# Altium PCB PCB SensorTemperatura.PcbDoc
Units mm, origin at the board's own origin, x right, y up, seen from the top; angles counter-clockwise.
Board outline 13 x 13 mm, 2 copper layers (Top Layer, Bottom Layer), stack 1.571 mm thick; 7 components, 5 nets, 18 pads, 0 vias.
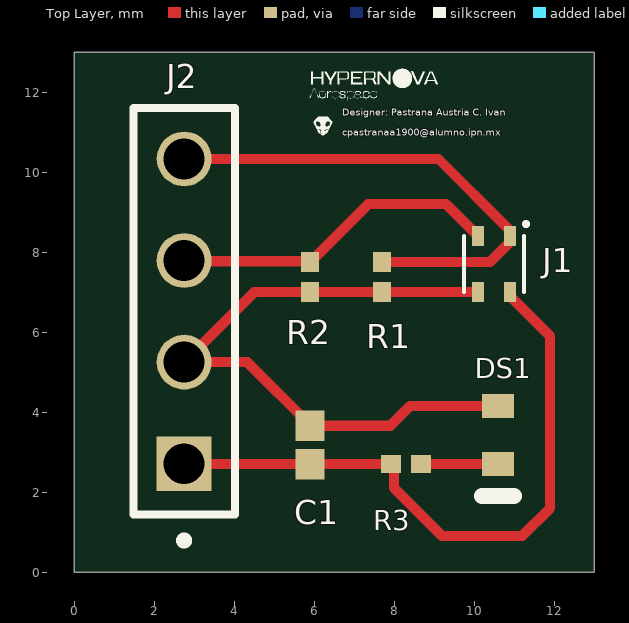
[diagram p0: Top Layer view]
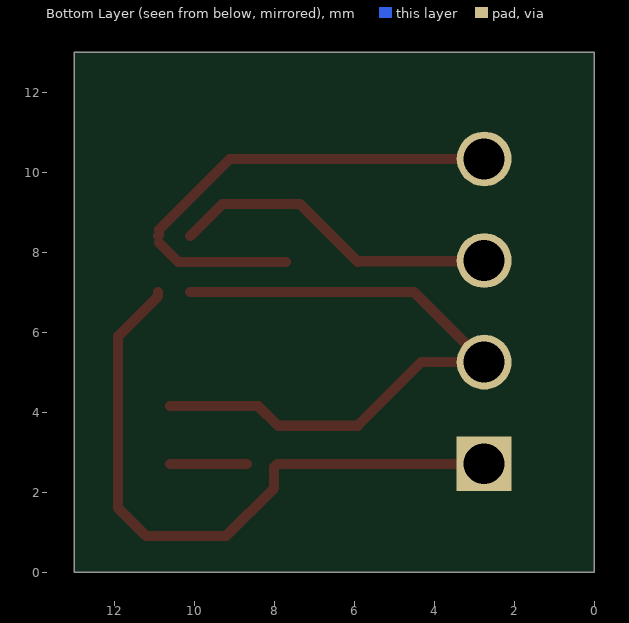
[diagram p1: Bottom Layer view, seen from below]

## Layer stack, top to bottom
Top Solder: solder mask 0.0102, Solder Resist, Dk 3.5
Top Layer: signal copper 0.0356
Dielectric 1: dielectric 1.5, FR-4, Dk 4.8
Bottom Layer: signal copper 0.0356
Bottom Solder: solder mask 0.0102, Solder Resist, Dk 3.5

## Board outline
0,13 13,13 13,0 0,0

## Design rules (kind name [scope] priority, off if disabled: settings)
Clearance [All] p1: gap=0.254 ignorepadtopadclearanceinfootprint=FALSE
PolygonConnect [All] p1: connectstyle=Relief reliefconductorwidth=0.254 reliefentries=4 polygonreliefangle="90 Angle" airgapwidth=0.254
RoutingVias [All] p1: holewidth=0.711 width=1.27 viastyle="Through Hole" minholewidth=0.711 minwidth=1.27 maxholewidth=0.711 maxwidth=1.27
SolderMaskExpansion [All] p1: expansion=0.102 istentingtop=FALSE
Width [All] p1: maxlimit=0.254 minlimit=0.254 preferedwidth=0.254
30 further rules are at their usual default settings.

## Components (designator, comment, footprint, x,y, rotation, side; value= is the part's Value field where it differs from the comment)
C1 "C0402C104K4RACTU" Capacitor 5.9,3.18 r90 top
DS1 "TLMS1100-GS08" "LED 0603" 10.6,3.425 r270 top
J1 "SHT40-AD1B-R2" SHT40 10.5,7.7 r270 top
J2 "Header 1x4" "Header 1x4" 2.75,6.52 r90 top
R1 "RC0402JR-070RL" Resistor 7.7,7.375 r270 top
R2 "RC0402JR-070RL" Resistor 5.9,7.375 r270 top
R3 "RC0402JR-070RL" Resistor 8.3,2.7 r0 top

## Footprints (in the part's own frame and the unit in brackets; to place one, negate y for a bottom-side part, rotate by r counter-clockwise, add the part's x,y. Pads: shape width x height; smd on the part's side, far side on the other; paste and mask are expansions set on the pad)
Capacitor [mm] "Chip Capacitor, 2-Leads, Body 1.00x0.50mm, IPC Low Density"
  rect 0.76x0.72 smd: 1(-0.48,0) 2(0.48,0)
  body extent -0.53,-0.28 0.53,0.27, height 0.55
"Header 1x4" [mm]
  rect 1.37x1.37 / inner round 1.37 / far side rect 1.37x1.37 hole 1.02: 01(-3.81,0)
  round 1.37 hole 1.02: 02(-1.27,0) 03(1.27,0) 04(3.81,0)
  silkscreen extent -5.83,-1.27 5.08,1.27
"LED 0603" [mm] "SMD, 2-Leads, Body 1.6x0.8mm"
  rect 0.6x0.8 smd: 1(-0.725,0) 2(0.725,0)
  silkscreen extent 1.53,-0.4 1.53,0.4, body extent -0.8,-0.4 0.8,0.4, height 0.65
Resistor [mm] "Chip Resistor, 2-Leads, Body 1.00x0.50mm, IPC High Density"
  rect 0.5x0.45 smd: 1(-0.375,0) 2(0.375,0)
  body extent -0.53,-0.27 0.53,0.28, height 0.4
SHT40 [mm]
  rect 0.5x0.3 smd: 1(-0.7,0.4) 2(-0.7,-0.4) 3(0.7,-0.4) 4(0.7,0.4)
  silkscreen extent -1.05,-0.75 0.7,0.85, body extent -0.75,-0.75 0.75,0.75, height 0.54

## Part data
C1: library part Capacitor, Manufacturer=Kemet, Part Number=C0402C104K4RACTU
DS1: library part "LED 0603", "LED, RED, 2.1 V, -40 to 100 degC, 2-Pin SMD (0603), RoHS, Tape and Reel", Capacitance="12 pF", Case Code (Imperial)=0603, Case Code (Metric)=1608, Max Operating Temperature=125degC, Min Operating Temperature=-55degC, Package Quantity=4000, Resistance="100000000000 Ohm", Tolerance=5%, Type (Capacitors)=C0G, Voltage Rating="50 V", Case/Package=0603, ComponentLink1Description="Manufacturer URL", ComponentLink1URL=http://www.vishay.com/, ComponentLink2Description=Datasheet, ComponentLink2URL=http://www.vishay.com/docs/83173/tlmb1100.pdf, DatasheetVersion="Rev. 2.7, 03/2016", Height="0.8 mm", Length="1.6 mm", Mount="Surface Mount", PackageDescription="2-Pin Surface Mount Device, Body 1.6 x 0.8 mm", PackageReference=TLMX1100, Packaging="Tape and Reel", Pins=2, Radiation Hardening=No, REACH SVHC="No SVHC", RoHSCompliant=True, Voltage Rating (DC)="50 V", Width="0.8 mm"
J1: "Humidity/Temperature Sensor Digital Serial (I2C) 4-Pin DFN EP T/R", Package=None, Availability="In Stock", Check_prices=https://www.snapeda.com/parts/SHT40-AD1B-R2/NSI/view-part/?ref=eda, MF="Sensirion AG", MP=SHT40-AD1B-R2, Price=None, Purchase-URL=https://pricing.snapeda.com/search/part/SHT40-AD1B-R2/?ref=eda, SnapEDA_Link=https://www.snapeda.com/parts/SHT40-AD1B-R2/NSI/view-part/?ref=snap
J2: "<a href=\"https://pricing.snapeda.com/parts/TSW-104-07-G-S/Samtec/view-part?ref=eda\">Check availability</a>", Package=None, Availability=Unavailable, MP=altium_native_batch, Price=None
R1 R2 R3: library part Resistor, Manufacturer="Yageo / Phycomp", Part Number=RC0402JR-070RL

## Nets (pads, with @x,y where several pads share a name; then routed paths per layer and width w, separated by ;. In a path a pad name is that pad's centre, name@x,y a point inside that pad or via, vN(x,y) a via of type N, cw(c..) or ccw(c..) an arc to the next point about the centre after c; other vN are vias at no path point)
GND: C1.1 J1.4 J2.01 R3.1 | length 16.3
  Top Layer w0.254: J2.01 2.76,2.7 C1.1 R3.1 8,2.625 8,2.1 9.195,0.905 11.205,0.905 11.9,1.6 11.9,5.9 10.9,6.9 J1.4
NetDS1_2: DS1.2 R3.2 | length 1.9
  Top Layer w0.254: R3.2 DS1.2
NetJ1_1: J1.1 J2.04 R1.1 | length 12.4
  Top Layer w0.254: J2.04 9.109,10.33 10.877,8.562 10.877,8.423 J1.1 ; R1.1 10.389,7.75 J1.1@10.877,8.238
NetJ1_2: J1.2 J2.03 R2.1 | length 8.3
  Top Layer w0.254: J2.03 2.77,7.77 5.88,7.77 R2.1 7.35,9.2 9.3,9.2 J1.2
VCC: C1.2 DS1.1 J1.3 J2.02 R1.2 R2.2 | length 16.8
  Top Layer w0.254: J1.3 R1.2 R2.2 4.5,7 J2.02 4.33,5.25 5.9,3.68 C1.2 7.903,3.66 8.393,4.15 DS1.1

## Polygon pours and split planes (outlines as drawn)
no net on Layer0 "Default Coverlay 1 Top" (split plane): -73.6,-37.1 78.8,-37.1 78.8,64.5 -73.6,64.5
no net on Layer0 "Default Coverlay 1 Bottom" (split plane): -73.6,-37.1 78.8,-37.1 78.8,64.5 -73.6,64.5

## Silkscreen, mask and mechanical layers (free items; w line width, h text height)
Top Overlay:
  drawing of 23 lines, arcs and shapes, not listed
  text "Designer: Pastrana Austria C. Ivan" at 6.7,11.352 h0.3
  text "cpastranaa1900@alumno.ipn.mx" at 6.7,10.852 h0.3